# Altium PCB C2Sv0 - Sensor.PcbDoc
Units mm, origin at the board's own origin, x right, y up, seen from the top; angles counter-clockwise.
Board outline 35 x 40 mm, 4 copper layers (Top Layer, Mid Layer 1, Mid Layer 2, Bottom Layer), stack 1.57 mm thick; 30 components, 24 nets, 191 pads, 85 vias.
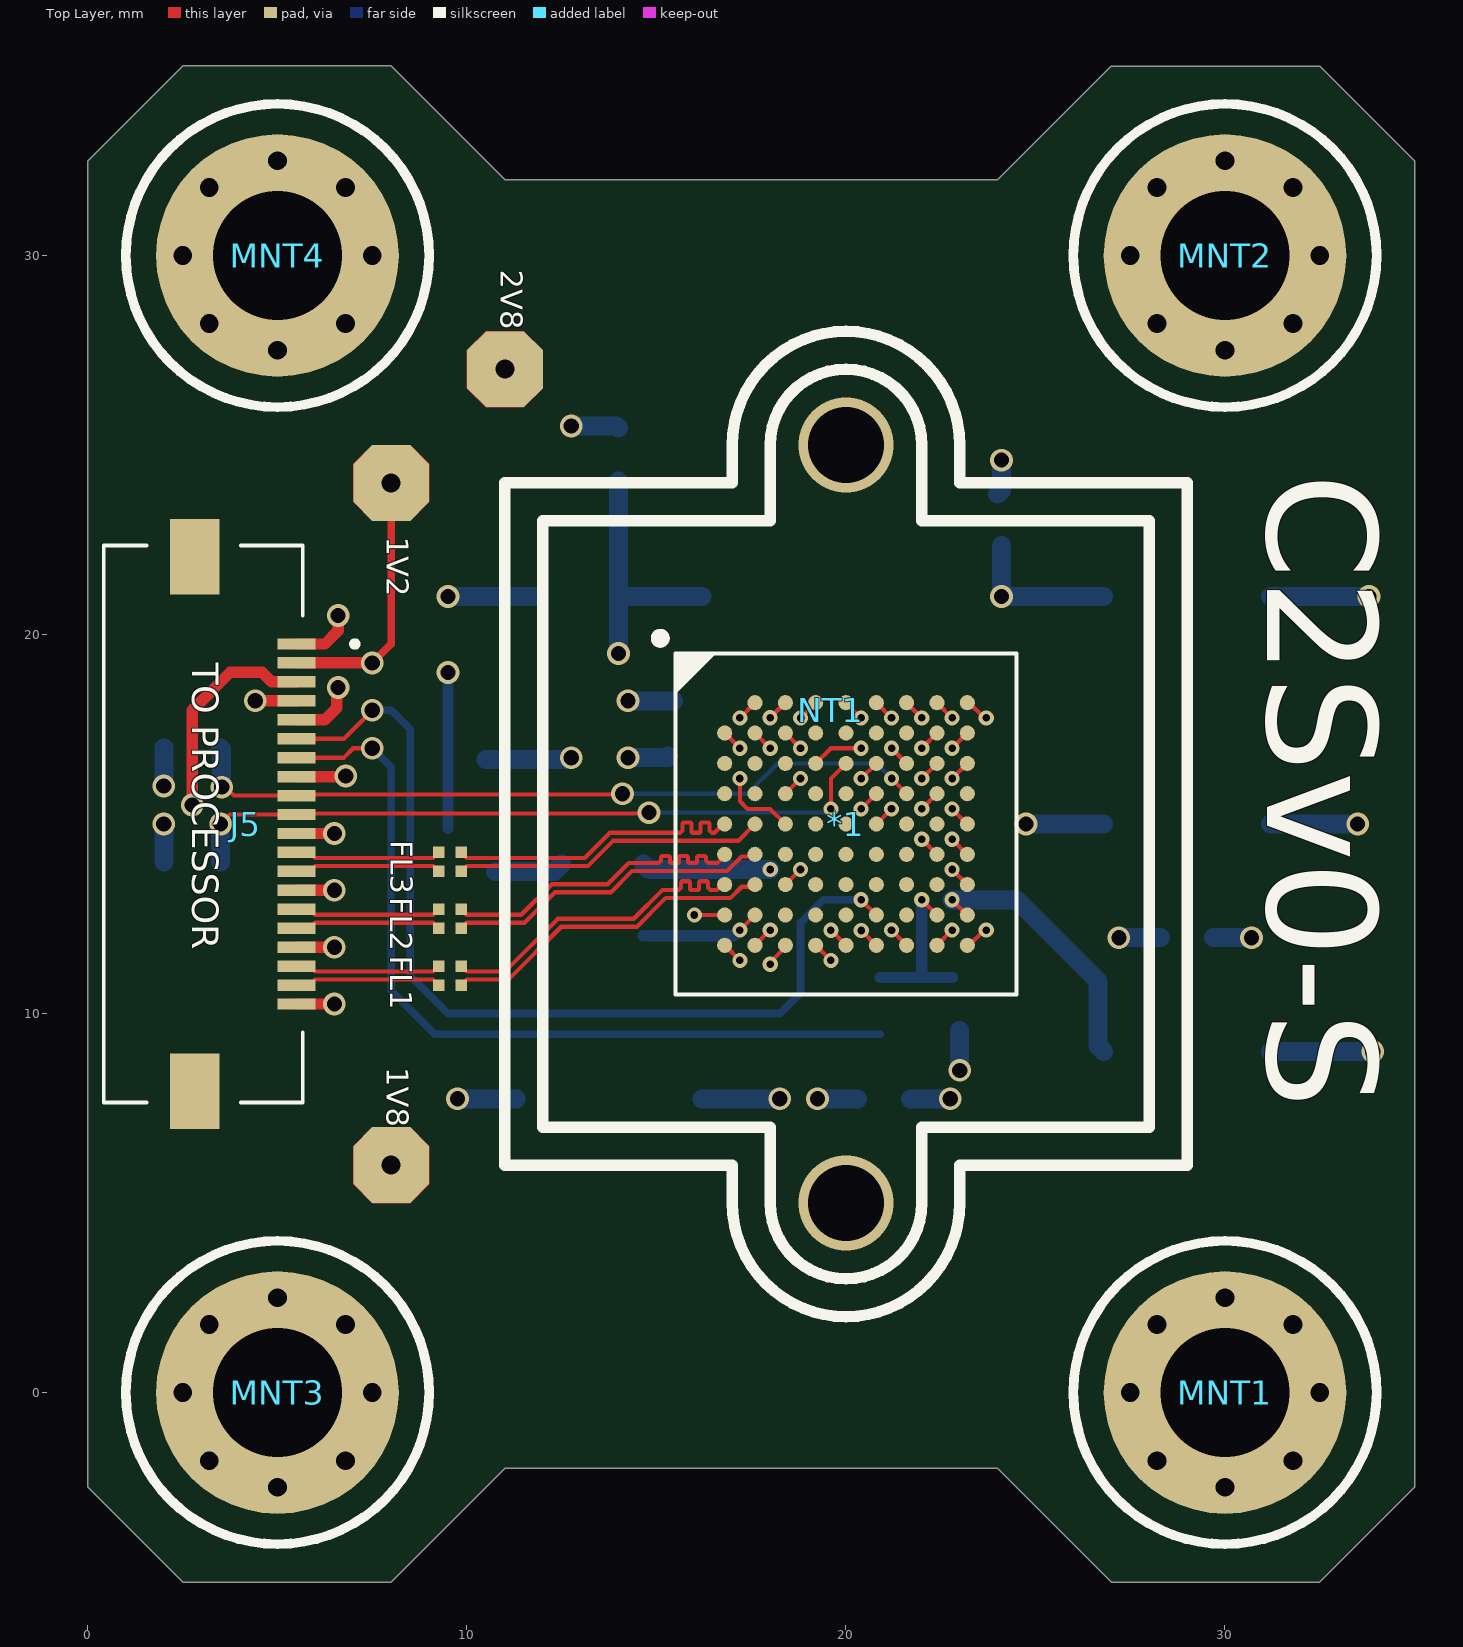
[diagram p0: Top Layer view]
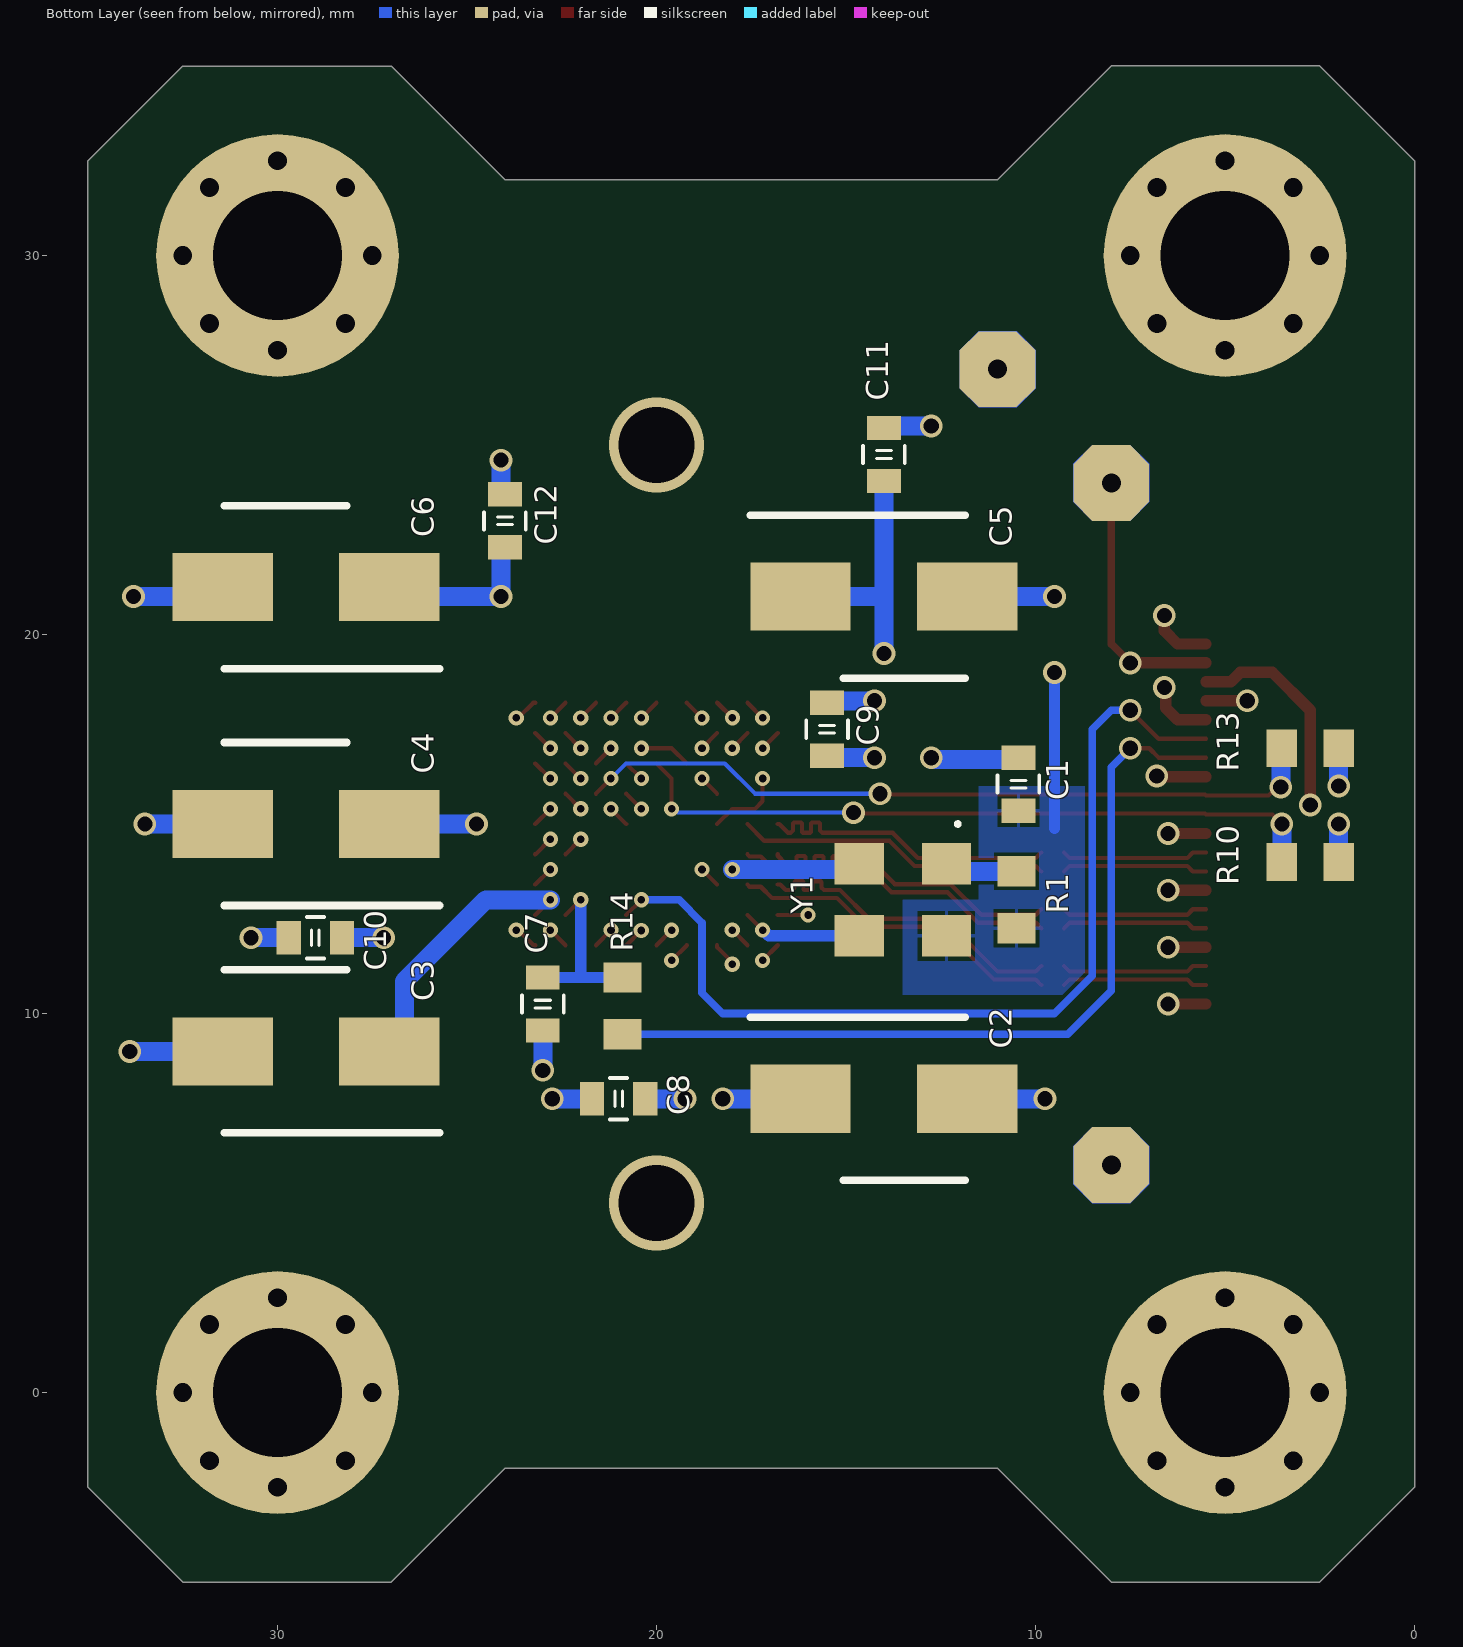
[diagram p1: Bottom Layer view, seen from below]
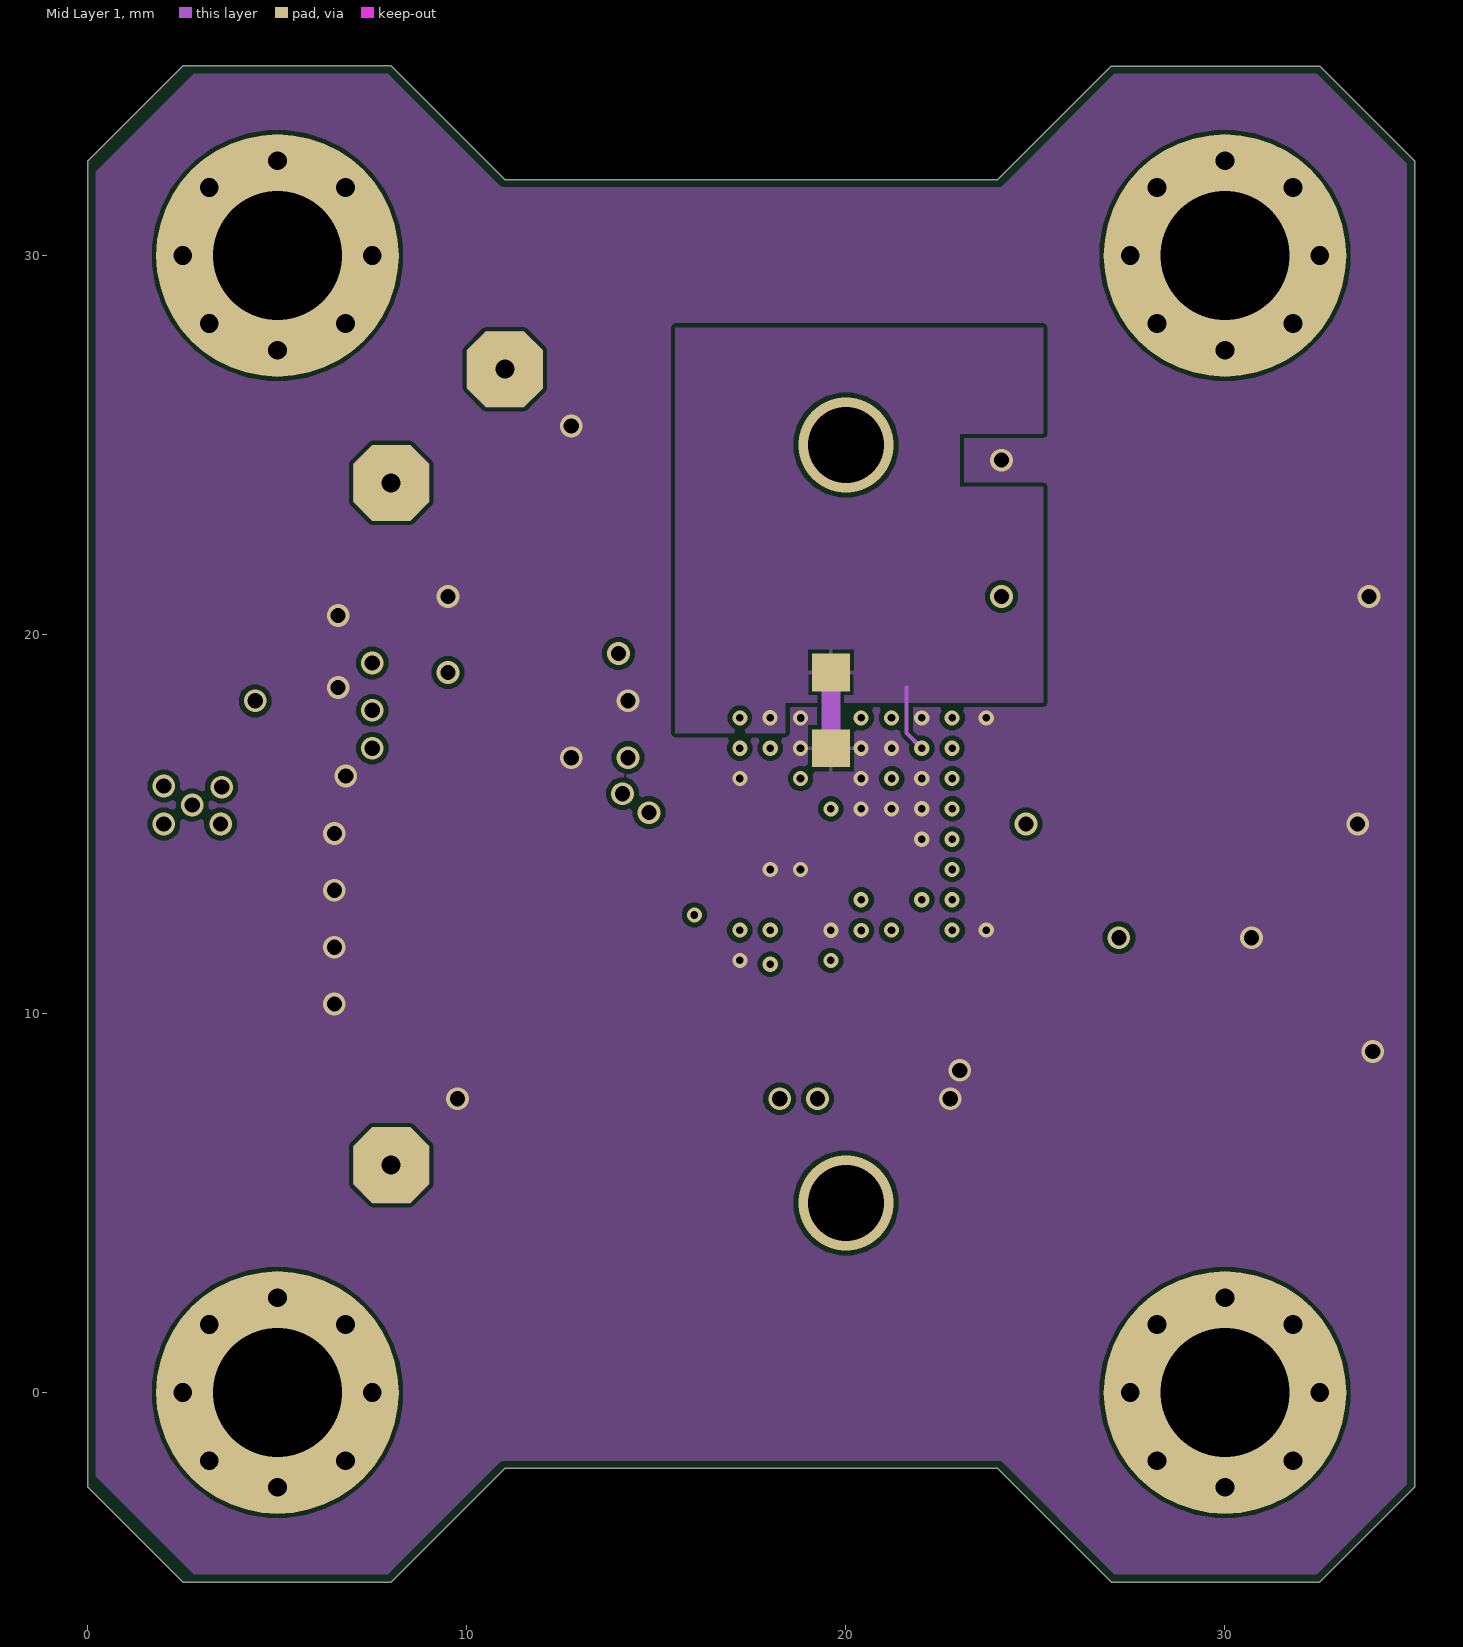
[diagram p2: Mid Layer 1]
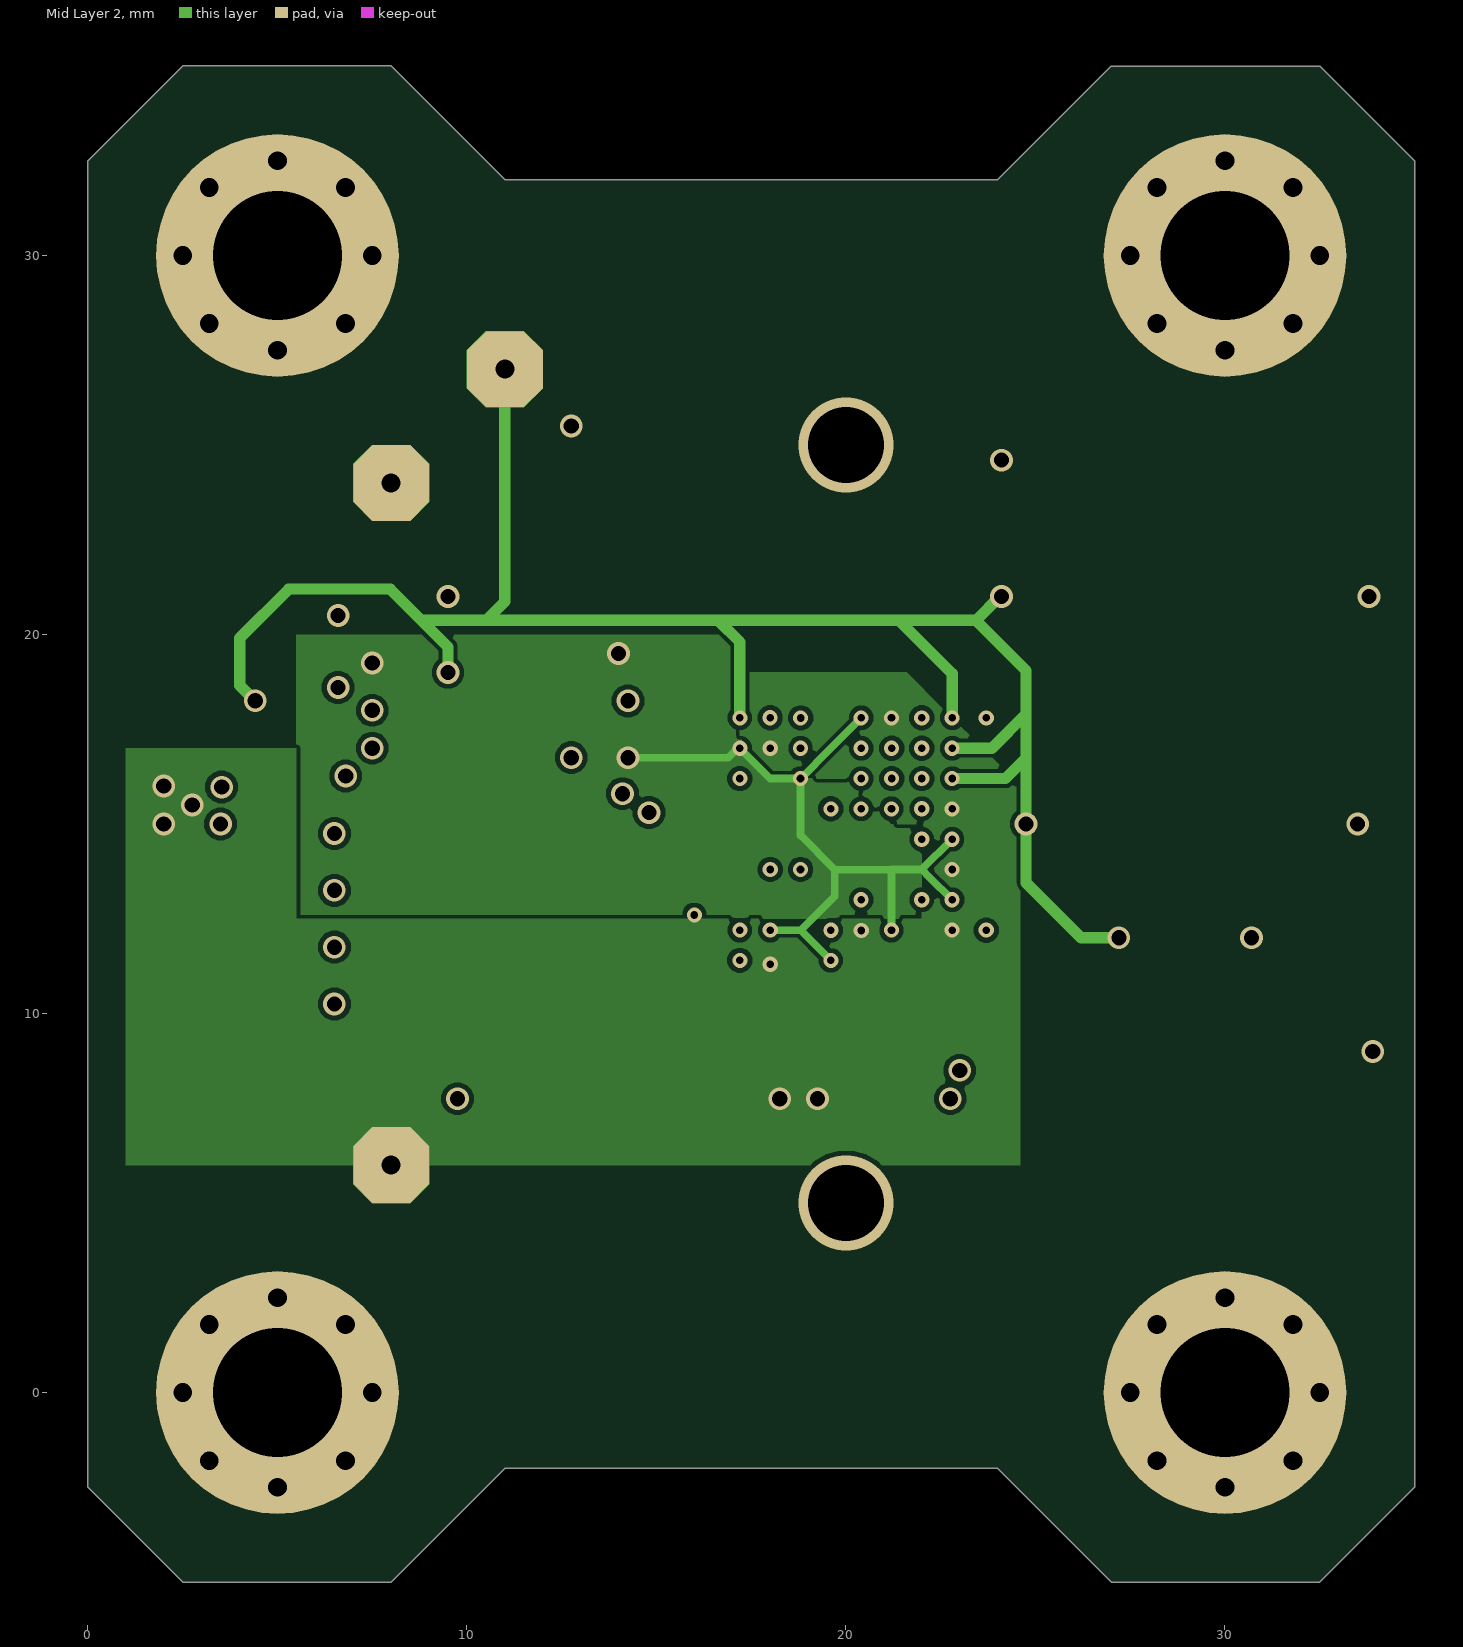
[diagram p3: Mid Layer 2]
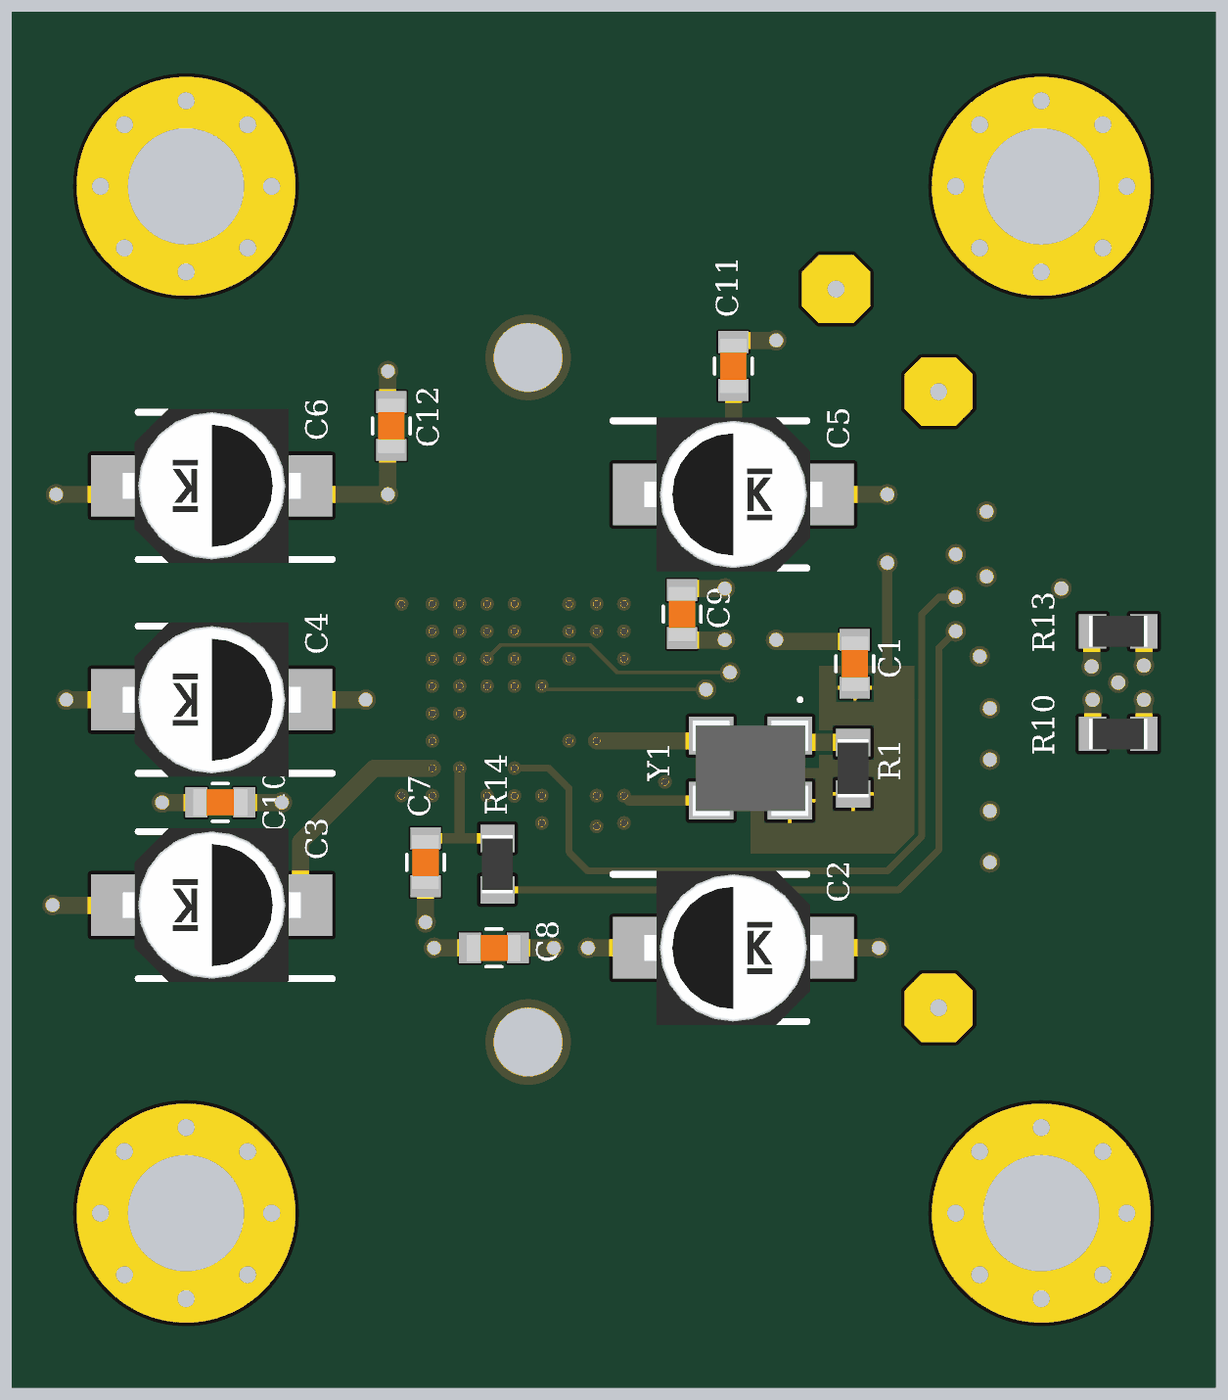
[diagram p4: 3D render of the assembled board from below, using the file's embedded part models]

## Layer stack, top to bottom
Top Solder: solder mask 0.0127, Solder Resist, Dk 3.8
Top Layer: signal copper 0.035
Dielectric 1: prepreg 0.1, 2313, Dk 4.05
Mid Layer 1: signal copper 0.0175
Core: core 1.265, FR-4, Dk 4.5
Mid Layer 2: signal copper 0.0175
Dielectric 2: prepreg 0.1, 2313, Dk 4.05
Bottom Layer: signal copper 0.035
Bottom Solder: solder mask 0.0127, Solder Resist, Dk 3.8

## Board outline
0,-2.5 2.5,-5 8,-5 11,-2 24,-2 27,-5 32.5,-5 35,-2.5 35,32.5 32.5,35 27,35 24,32 11,32 8,35 2.5,35 0,32.5

## Design rules (kind name [scope] priority, off if disabled: settings)
BoardOutlineClearance [All] p1: gap=0.2 ignorepadtopadclearanceinfootprint=FALSE
Clearance [All] p1: gap=0.102 ignorepadtopadclearanceinfootprint=TRUE except(0.127: Arc-Via Track-Via SMDPad-Via THPad-Via Via-Via Via-Fill Via-Poly Via-Region Via-Text)
ComponentClearance [All] p1: gap=0.102 collisioncheckmode=3 verticalgap=0.102 showdistances=TRUE
DiffPairsRouting [All] p1: maxlimit=0.102 minlimit=0.102 mostfreqgap=0.102 toplayer_minwidth=0.102 toplayer_maxwidth=1816.048 toplayer_prefwidth=0.102 midlayer1_minwidth=0.102 midlayer1_maxwidth=1816.048 midlayer1_prefwidth=0.102 midlayer2_minwidth=0.102 midlayer2_maxwidth=1816.048 midlayer2_prefwidth=0.102 bottomlayer_minwidth=0.102 bottomlayer_maxwidth=1816.048 bottomlayer_prefwidth=0.102 maxuncoupledlength=12.7
Height [All] p1: minheight=0 maxheight=1816.048 prefheight=12.7
HoleSize [All] p1: absolutevalues=TRUE maxlimit=6.3 minlimit=0.2 maxpercent=80.000 minpercent=20.000
HoleToHoleClearance [All] p1: gap=0.25 allowstackedmicrovias=FALSE
MatchedLengths [InDifferentialPairClass('All Differential Pairs')] p1: tolerance=25.4 checknetsindiffpair=FALSE checkdiffpairvsdiffpair=TRUE checkxsignals=TRUE checkothers=TRUE usedelayunits=TRUE delaytolerance=40.000000
MinimumAnnularRing [All] p1: minimumring=0.076
MinimumSolderMaskSliver [All] p1: minsoldermaskwidth=0
PlaneClearance [All] p1: clearance=0.102
PlaneConnect PlaneConnectPowerPads [InPadClass('PowerPads')] p1: planeconnectstyle=Direct reliefexpansion=0.508 reliefentries=4 reliefconductorwidth=0.254 reliefairgap=0.254
PlaneConnect [All] p2: pad.planeconnectstyle=Relief pad.reliefexpansion=0.3 pad.reliefentries=4 pad.reliefconductorwidth=0.102 pad.reliefairgap=0.102 via.planeconnectstyle=Direct via.reliefexpansion=0.3 via.reliefentries=4 via.reliefconductorwidth=0.127 via.reliefairgap=0.127
PolygonConnect PolygonConnectPowerPads [All vs (InPadClass('PowerPads'))] p1: connectstyle=Direct reliefconductorwidth=0.254 reliefentries=4 polygonreliefangle="90 Angle" airgapwidth=0.254
PolygonConnect [All] p2: thpad.connectstyle=Relief thpad.reliefconductorwidth=0.102 thpad.reliefentries=4 thpad.polygonreliefangle="90 Angle" thpad.airgapwidth=0.102 smdpad.connectstyle=Relief smdpad.reliefconductorwidth=0.102 smdpad.reliefentries=4 smdpad.polygonreliefangle="90 Angle" smdpad.airgapwidth=0.102 via.connectstyle=Direct via.reliefconductorwidth=0.127 via.reliefentries=4 via.polygonreliefangle="90 Angle" via.airgapwidth=0.127
RoutingVias [All] p1: holewidth=0.2 width=0.45 viastyle="Through Hole" minholewidth=0.15 minwidth=0.25 maxholewidth=6.3 maxwidth=6.55
SilkToSilkClearance [All] p1: silktosilkclearance=0
SilkToSolderMaskClearance [IsPad] p1: minsilkscreentomaskgap=0.102 clearancetoexposedcopper=TRUE
SolderMaskExpansion SME_Via [IsVia] p1: expansion=0.102 istentingtop=TRUE
SolderMaskExpansion [All] p2: expansion=0.102 istentingtop=FALSE
SupplyNets "Schematic Supply Nets_9" [InNet('DGND')] p1: voltage=0.000
SupplyNets "Schematic Supply Nets_6" [InNet('2V8')] p2: voltage=0.000
SupplyNets "Schematic Supply Nets_5" [InNet('AGND')] p3: voltage=0.000
SupplyNets "Schematic Supply Nets_2" [InNet('1V8')] p4: voltage=0.000
SupplyNets "Schematic Supply Nets" [InNet('1V2')] p5: voltage=0.000
Width [All] p1: maxlimit=1816.048 minlimit=0.102 preferedwidth=0.102
20 further rules are at their usual default settings.

## Classes and differential pairs
differential pair STM_DATA1: +STM_DATA1_P -STM_DATA1_N
differential pair STM_DATA0: +STM_DATA0_P -STM_DATA0_N
differential pair STM_CLK: +STM_CLK_P -STM_CLK_N
differential pair AR_DATA1: +AR_DATA1_P -AR_DATA1_N
differential pair AR_DATA0: +AR_DATA0_P -AR_DATA0_N
differential pair AR_CLK: +AR_CLK_P -AR_CLK_N

## Components (designator, comment, footprint, x,y, rotation, side; value= is the part's Value field where it differs from the comment)
1V2 "TP_2MM" "TESTPOINT 2MM" 8,24 r0 top
1V8 "TP_2MM" "TESTPOINT 2MM" 8,6 r0 top
2V8 "TP_2MM" "TESTPOINT 2MM" 11,27 r0 top
*1 "AR0147 - iBGA80" "AR0147 - IBGA80" 20,15 r270 top locked
C1 "MCD-00237" C0603 10.449,16.051 r270 bottom value=4.7uF
C2 "EDH106M016A9BAA" EDH106M016A9BAA 14,7.75 r180 bottom
C3 "EDH106M016A9BAA" EDH106M016A9BAA 29.25,9 r0 bottom
C4 "EDH106M016A9BAA" EDH106M016A9BAA 29.25,15 r0 bottom
C5 "EDH106M016A9BAA" EDH106M016A9BAA 14,21 r180 bottom
C6 "EDH106M016A9BAA" EDH106M016A9BAA 29.25,21.25 r0 bottom
C7 "MCD-00237" C0603 23,10.25 r90 bottom value=100nF
C8 "MCD-00237" C0603 21,7.75 r180 bottom value=0.1uF
C9 "MCD-00237" C0603 15.5,17.5 r270 bottom value=0.1uF
C10 "MCD-00237" C0603 29,12 r180 bottom value=0.1uF
C11 "MCD-00237" C0603 14,24.75 r270 bottom value=0.1uF
C12 "MCD-00237" C0603 24,23 r270 bottom value=0.1uF
FL1 "DLM0NSB120HY2D" DLM0NSB120HY2D 9.55,11 r180 top
FL2 "DLM0NSB120HY2D" DLM0NSB120HY2D 9.55,12.5 r180 top
FL3 "DLM0NSB120HY2D" DLM0NSB120HY2D 9.55,14 r180 top
J5 "505110-2096" 5051102096 5,15 r270 top
MNT1 "M3 Mount" M3_Mount-Footprint-1 30,0 r0 top
MNT2 "M3 Mount" M3_Mount-Footprint-1 30,30 r0 top
MNT3 "M3 Mount" M3_Mount-Footprint-1 5,0 r0 top
MNT4 "M3 Mount" M3_Mount-Footprint-1 5,30 r0 top
NT1 "NetTie_SMD" NETTIE_SMD 19.6,18 r270 top net-tie
R1 "Resistor 10k +/-1% 0603 100mW" RESC1608X55X25ML10T15-1 10.5,13 r90 bottom value=10k
R10 "Resistor 10k +/-1% 0603 100mW" RESC1608X55X25ML10T15-1 2.75,14 r0 bottom value=1.5k
R13 "Resistor 10k +/-1% 0603 100mW" RESC1608X55X25ML10T15-1 2.75,17 r0 bottom value=1.5k
R14 "Resistor 10k +/-1% 0603 100mW" RESC1608X55X25ML10T15-1 20.9,10.2 r90 bottom value=22k
Y1 "ECS-TXO-3225MV-240-TR" ECSTXO3225MV240TR 13.5,13 r0 bottom

## Footprints (in the part's own frame and the unit in brackets; to place one, negate y for a bottom-side part, rotate by r counter-clockwise, add the part's x,y. Pads: shape width x height; smd on the part's side, far side on the other; paste and mask are expansions set on the pad)
5051102096 [mm]
  rect 0.3x1 smd: 1(-4.75,0.5) 2(-4.25,0.5) 3(-3.75,0.5) 4(-3.25,0.5) 5(-2.75,0.5) 6(-2.25,0.5) 7(-1.75,0.5) 8(-1.25,0.5) 9(-0.75,0.5) 10(-0.25,0.5) 11(0.25,0.5) 12(0.75,0.5) 13(1.25,0.5) 14(1.75,0.5) 15(2.25,0.5) 16(2.75,0.5) 17(3.25,0.5) 18(3.75,0.5) 19(4.25,0.5) 20(4.75,0.5)
  rect 2x1.3 smd: MP1(-7.05,-2.185) MP2(7.05,-2.185)
  silkscreen extent -7.35,-4.58 7.35,2.09, body extent -7.75,-4.53 7.75,0.77, height 1.9
"AR0147 - IBGA80" [mm]
  round 0.4 smd: A2(-3.2,-2.4) A3(-3.2,-1.6) A4(-3.2,-0.8) A5(-3.2,0) A6(-3.2,0.8) A7(-3.2,1.6) A8(-3.2,2.4) A9(-3.2,3.2) B1(-2.4,-3.2) B2(-2.4,-2.4) B3(-2.4,-1.6) B4(-2.4,-0.8) B5(-2.4,0) B6(-2.4,0.8) B7(-2.4,1.6) B8(-2.4,2.4) B9(-2.4,3.2) C1(-1.6,-3.2) C2(-1.6,-2.4) C3(-1.6,-1.6) C4(-1.6,-0.8) C5(-1.6,0) C6(-1.6,0.8) C7(-1.6,1.6) C8(-1.6,2.4) C9(-1.6,3.2) D1(-0.8,-3.2) D2(-0.8,-2.4) D3(-0.8,-1.6) D4(-0.8,-0.8) D5(-0.8,0) D6(-0.8,0.8) D7(-0.8,1.6) D8(-0.8,2.4) D9(-0.8,3.2) E1(0,-3.2) E2(0,-2.4) E3(0,-1.6) E4(0,-0.8) E5(0,0) E6(0,0.8) E7(0,1.6) E8(0,2.4) E9(0,3.2) F1(0.8,-3.2) F2(0.8,-2.4) F3(0.8,-1.6) F4(0.8,-0.8) F5(0.8,0) F6(0.8,0.8) F7(0.8,1.6) F8(0.8,2.4) F9(0.8,3.2) G1(1.6,-3.2) G2(1.6,-2.4) G3(1.6,-1.6) G4(1.6,-0.8) G5(1.6,0) G6(1.6,0.8) G7(1.6,1.6) G8(1.6,2.4) G9(1.6,3.2) H1(2.4,-3.2) H2(2.4,-2.4) H3(2.4,-1.6) H4(2.4,-0.8) H5(2.4,0) H6(2.4,0.8) H7(2.4,1.6) H8(2.4,2.4) H9(2.4,3.2) J1(3.2,-3.2) J2(3.2,-2.4) J3(3.2,-1.6) J4(3.2,-0.8) J5(3.2,0) J6(3.2,0.8) J7(3.2,1.6) J8(3.2,2.4) J9(3.2,3.2)
  silkscreen extent -13,-9 13,9, body extent -4.5,-4.5 4.5,4.5, height 1.5
C0603 [mm]
  rect 0.64x0.89 smd mask+0.05: 1(-0.7,0) 2(0.7,0)
  silkscreen extent -0.23,-0.55 0.23,0.55, body extent -0.9,-0.5 0.9,0.5, height 1.4
DLM0NSB120HY2D [mm]
  rect 0.3x0.3 smd: 1(-0.3,0.25) 2(0.3,0.25) 3(0.3,-0.25) 4(-0.3,-0.25)
  body extent -0.43,-0.33 0.43,0.33, height 0.45
ECSTXO3225MV240TR [mm]
  rect 1.3x1.1 smd: 1(-1.15,-0.95) 2(1.15,-0.95) 3(1.15,0.95) 4(-1.15,0.95)
  silkscreen extent -1.5,-2.05 -1.4,-1.95, body extent -1.69,-1.39 1.69,1.39, height 1.3
EDH106M016A9BAA [mm]
  rect 2.65x1.8 smd: 1(-2.2,0) 2(2.2,0)
  silkscreen extent -3.52,-2.15 2.15,2.15, body extent -2.6,-2.25 2.6,2.25, height 5.66
M3_Mount-Footprint-1 [mm]
  round 0.8 hole 0.5: 1(-2.5,0) 1(-1.8,-1.8) 1(-1.8,1.8) 1(0,-2.5) 1(0,2.5) 1(1.8,-1.8) 1(1.8,1.8) 1(2.5,0)
  round 6.4 hole 3.4: 1(0,0)
NETTIE_SMD [mm]
  rect 1x1 on Mid1 mask-10: 1(-1,0) 2(1,0)
  Mid Layer 1 region: -0.75,-0.251 0.75,-0.251 0.75,0.249 -0.75,0.249
RESC1608X55X25ML10T15-1 [mm] "Chip Resistor, 2-Leads, Body 1.70x0.90mm, IPC Low Density"
  rect 0.8x1 smd: 1(-0.75,0) 2(0.75,0)
  body extent -0.85,-0.45 0.85,0.45, height 0.55
"TESTPOINT 2MM" [mm]
  oct 2x2 hole 0.5: TP(0,0)
  Top Layer region: -0.5,-1 -1,-0.5 -1,0.5 -0.5,1 0.5,1 1,0.5 1,-0.5 0.5,-1
  Mid Layer 1 region: -0.5,-1 -1,-0.5 -1,0.5 -0.5,1 0.5,1 1,0.5 1,-0.5 0.5,-1
  Mid Layer 2 region: -0.5,-1 -1,-0.5 -1,0.5 -0.5,1 0.5,1 1,0.5 1,-0.5 0.5,-1
  Bottom Layer region: -0.5,-1 -1,-0.5 -1,0.5 -0.5,1 0.5,1 1,0.5 1,-0.5 0.5,-1

## Part data
C1 C7 C8 C9 C10 C11 C12: library part CMP-112-000001-1, "Capacitor, MLCC, 100nF, 6V3, X5R, 10%, 0603, T=0,8mm", Manufacturer=YAGEO, Manufacturer Part Number=CC0603KRX5R5BB104, Package=C0603, Component Type=Capacitors, ComponentLink1Description=Datasheet, ComponentLink1URL=http://tunmcdsvn.tun.st.com/Component_Datasheet_Library/Trunk/Capacitors/Yageo_Multilayer_capacitor_X5R_series_100pF_to_100uF, Design Item ID=MCD-00237, ECCN_EU=NEC, ECCN_US=EAR99, Internal_Part_Number=MCD-00237, Manufacturer_Part_Number=CC0603KRX5R5BB104, Part_Type=Capacitor, Pin Count=2, Provided_By=SUBCO, Source=MB1364.SCHLIB, Status=Released
C2 C3 C4 C5 C6: "Capacitor Polarised", Manufacturer_Name=KEMET, Mouser Part Number=80-EDH106M016A9BAA, Arrow Part Number=EDH106M016A9BAA, Arrow Price/Stock=https://www.arrow.com/en/products/edh106m016a9baa/kemet-corporation?utm_currency=USD&region=nac, Datasheet Link=https://content.kemet.com/datasheets/KEM_A4049_EDH.pdf, Height=5.65mm, Manufacturer_Part_Number=EDH106M016A9BAA, Mouser Price/Stock=https://www.mouser.co.uk/ProductDetail/KEMET/EDH106M016A9BAA?qs=iR2ablhfrmGRSCLQdrL4eg%3D%3D
FL1 FL2 FL3: "Filter", Manufacturer_Name="Murata Electronics", Mouser Part Number=81-DLM0NSB120HY2D, Datasheet Link=https://www.murata.com/en-us/products/productdetail?partno=DLM0NSB120HY2%23, Height=0.5mm, Manufacturer_Part_Number=DLM0NSB120HY2D, Mouser Price/Stock=https://www.mouser.co.uk/ProductDetail/Murata-Electronics/DLM0NSB120HY2D?qs=d0WKAl%252BL4Kark8uQYdrkog%3D%3D
J5: "Connector", Manufacturer_Name=Molex, Mouser Part Number=538-505110-2096, Datasheet Link=https://componentsearchengine.com/Datasheets/1/505110-2096.pdf, Height=2.1mm, Manufacturer_Part_Number=505110-2096, Mouser Price/Stock=https://www.mouser.co.uk/ProductDetail/Molex/505110-2096?qs=IvjI65BR3TVK2gHWyfgM0A%3D%3D
MNT1 MNT2 MNT3 MNT4: library part CMP-002-00124-2, "M3 mounting hole", AUTHOR="Raphael Ho"
NT1: library part CMP-018-000019-1, "Net Tie SMD", Design Item ID=NetTie_SMD, Source=Schematic-Lib-PhilsLab.SchLib
R1 R10 R13 R14: library part CMP-009-00181-1, "Chip Resistor, 10k Ohm, 0.1 W, -55 to 155 degC, 0603 (1608 Metric)", Case/Package=0603, Max Operating Temperature=155°C, Min Operating Temperature=-55°C, Power=100mW, Tolerance=1%, Voltage Rating=50V, Created by="Micah Randall", Design Item ID=CMP-009-00006-5, Mounting Technology=SM, Pins=2, RoHS Compliant=Yes, Source="Components - 14.11.22 - 11.28.SchLib"
Y1: "Crystal or Oscillator", Manufacturer_Name=ECS, Mouser Part Number=520-TXO-3225MV-240-T, Arrow Part Number=ECS-TXO-3225MV-240-TR, Arrow Price/Stock=https://www.arrow.com/en/products/ecs-txo-3225mv-240-tr/ecs-international?region=nac, Datasheet Link=https://eu.mouser.com/datasheet/2/122/ECS-TXO-3225MV-1634330.pdf, Height=1.2mm, Manufacturer_Part_Number=ECS-TXO-3225MV-240-TR, Mouser Price/Stock=https://www.mouser.co.uk/ProductDetail/ECS/ECS-TXO-3225MV-240-TR?qs=d0WKAl%252BL4KYXn7UuwSFJGQ%3D%3D

## Via types
v1: diameter 0.4, hole 0.2, Top Layer to Bottom Layer, tented both sides, 45 vias
v2: diameter 0.6, hole 0.4, Top Layer to Bottom Layer, tented both sides, 38 vias
v3: diameter 2.5, hole 2, Top Layer to Bottom Layer, 2 vias

## Nets (pads, with @x,y where several pads share a name; then routed paths per layer and width w, separated by ;. In a path a pad name is that pad's centre, name@x,y a point inside that pad or via, vN(x,y) a via of type N, cw(c..) or ccw(c..) an arc to the next point about the centre after c; other vN are vias at no path point)
1V2: 1V2.TP *1.A5 *1.B1 *1.D3 *1.F9 *1.H9 *1.J2 *1.J4 *1.J7 C3.1 C5.1 C9.2 C11.2 J5.2 | length 46.1
  Top Layer w0.11: *1.B1 v1(17.2,17) ; *1.J2 v1(18,12.2) ; *1.D3 v1(18.8,16.2) ; *1.J4 v1(19.6,11.4) ; *1.A5 v1(20.4,17.8) ; v1(21.2,12.2) *1.J7 ; v1(22.798,14.598) 22.8,14.598 23.198,14.2 *1.F9 *1.F9@23.209,14.2 ; v1(22.8,13) *1.H9
  Top Layer w0.2: v2(7.5,19.25) 8,19.75 1V2.TP
  Top Layer w0.3: J5.2 v2(7.5,19.25)
  Mid Layer 2 w0.2: v2(14.25,16.75) 16.896,16.75 17.146,17 v1(17.2,17) 18,16.2 v1(18.8,16.2) ; v1(18,12.2) 18.802,12.2 ; v1(19.6,11.4) 18.802,12.198 18.802,12.2 ; v1(20.4,17.8) 19.6,17 v1(18.8,16.2) ; v1(21.2,12.2) 21.2,13.8 ; v1(22.798,14.598) 22,13.8 ; v1(22.8,13) 22.2,13.6 22,13.8 ; v1(18.8,16.2) 18.8,14.697 19.7,13.797 ; 18.802,12.2 19.7,13.098 19.7,13.797 ; 19.7,13.797 21.197,13.797 21.2,13.8 ; 21.2,13.8 22,13.8
  Bottom Layer w0.5: v2(14,19.5) 14,21 ; C11.2 14,21 ; v2(14.25,16.75) 15.305,16.75 C9.2@15.305,16.8 ; C5.1 16,21 14,21 ; v1(22.8,13) 24.5,13 26.654,10.846 26.654,9.146 C3.1@26.8,9
1V8: 1V8.TP *1.A6 *1.B2 *1.E9 *1.G9 *1.H1 *1.J3 *1.J6 *1.J8 C2.1 C8.2 J5.3 R10.1 R13.1 | length 15.7
  Top Layer w0.11: v1(16,12.6) *1.H1 ; *1.B2 v1(18,17) ; v1(18,11.3) 18,11.35 18.4,11.75 *1.J3 ; v1(20.402,12.19) 20.405,12.19 20.795,11.8 *1.J6 ; *1.A6 v1(21.2,17.8) ; *1.J8 v1(22.8,12.2) ; v1(22.8,13.8) *1.G9 ; v1(22.8,15.4) *1.E9
  Top Layer w0.3: v2(2.75,15.5) 2.75,18 3.75,19 4.6,19 4.85,18.75 J5.3
  Bottom Layer w0.5: R10.1 v2(2,15) ; v2(2,16) R13.1 ; C2.1 v2(18.25,7.75) ; v2(19.25,7.75) C8.2
2V8: 2V8.TP *1.A2 *1.A8 *1.B9 *1.C9 C1.2 C4.1 C6.1 C10.2 C12.2 J5.4 R1.1 Y1.4 | length 67.2
  Top Layer w0.11: v1(17.2,17.8) *1.A2 ; *1.A8 v1(22.8,17.8) ; v1(22.798,16.2) *1.C9 ; v1(22.798,17) *1.B9
  Top Layer w0.3: v2(4.411,18.25) J5.4
  Mid Layer 2 w0.3: v2(4.411,18.25) 4,18.661 4,19.9 5.3,21.2 7.971,21.2 8.8,20.371 ; v2(9.5,19) 9.5,19.671 8.8,20.371 ; 2V8.TP 11,20.871 10.5,20.371 ; v1(17.2,17.8) 17.2,19.8 16.629,20.371 ; v1(22.798,16.2) 24.207,16.2 24.75,16.743 ; v1(22.798,17) 23.85,17 24.75,17.9 ; v1(22.8,17.8) 22.8,18.971 21.4,20.371 ; v2(24.1,21) 24.058,21 23.429,20.371 ; v2(27.2,12) 26.2,12 24.75,13.45 v2(24.75,15) 24.75,16.743 ; 8.8,20.371 10.5,20.371 ; 10.5,20.371 16.629,20.371 ; 16.629,20.371 21.4,20.371 ; 21.4,20.371 23.429,20.371 ; 23.429,20.371 24.75,19.05 24.75,17.9 ; 24.75,16.743 24.75,17.9
  Bottom Layer w0.3: 9.5,14.89 v2(9.5,19)
  Bottom Layer w0.5: C12.2@24.1,22.35 v2(24.1,21) C6.1@26.8,21 ; v2(24.75,15) C4.1@26.8,15 ; v2(27.2,12) C10.2
AGND: *1.A3 *1.B8 NT1.1 | length 2.9
  Top Layer w0.11: v1(17.998,17.802) 18,17.802 18.398,18.2 *1.A3 ; v1(22,17) *1.B8
  Mid Layer 1 w0.11: 21.6,18.6 21.6,17.4 v1(22,17)
AR_CLK: *1.H2 Y1.3 | length 3.2
  Top Layer w0.11: v1(17.2,12.2) *1.H2
  Bottom Layer w0.3: Y1.3 17.036,12.05 17.186,12.2 v1(17.2,12.2)
AR_CLK_N: *1.E2 FL3.1 | length 8.3
  Top Layer w0.11: FL3.1 9.994,13.894 13.193,13.894 13.856,14.557 17.157,14.557 *1.E2
AR_CLK_P: *1.E1 FL3.4 | length 8.3
  Top Layer w0.11: FL3.4 9.994,14.106 13.106,14.106 13.768,14.768 15.566,14.768 15.621,14.768 15.685,14.833 15.685,15.014 15.709,15.037 15.899,15.037 15.922,15.014 15.922,14.792 15.946,14.768 16.136,14.768 16.159,14.792 16.159,15.014 16.183,15.037 16.373,15.037 16.396,15.014 16.396,14.833 16.461,14.768 16.528,14.768 16.76,15 *1.E1
AR_DATA0_N: *1.G2 FL1.1 | length 8.8
  Top Layer w0.11: FL1.1 9.994,10.894 11.093,10.894 12.488,12.288 14.488,12.288 15.243,13.043 16.948,13.043 17.249,13.345 17.545,13.345 *1.G2
AR_DATA0_P: *1.G1 FL1.4 | length 8.7
  Top Layer w0.11: FL1.4 9.994,11.106 11.006,11.106 12.4,12.5 14.4,12.5 15.155,13.255 15.528,13.255 15.583,13.255 15.647,13.319 15.647,13.464 15.671,13.488 15.86,13.488 15.884,13.464 15.884,13.279 15.908,13.255 16.097,13.255 16.121,13.279 16.121,13.464 16.145,13.488 16.334,13.488 16.358,13.464 16.358,13.319 16.423,13.255 16.591,13.255 16.736,13.4 *1.G1
AR_DATA1_N: *1.F2 FL2.1 | length 8.6
  Top Layer w0.11: FL2.1 9.994,12.394 11.52,12.394 12.326,13.2 13.8,13.2 14.357,13.757 16.607,13.757 16.861,13.757 17.249,14.145 17.545,14.145 *1.F2
AR_DATA1_P: *1.F1 FL2.4 | length 8.6
  Top Layer w0.11: FL2.4 9.994,12.606 11.432,12.606 12.238,13.412 13.712,13.412 14.269,13.968 15,13.968 15.055,13.968 15.119,14.033 15.119,14.128 15.143,14.152 15.333,14.152 15.356,14.128 15.356,13.992 15.38,13.968 15.57,13.968 15.593,13.992 15.593,14.128 15.617,14.152 15.807,14.152 15.83,14.128 15.83,13.992 15.854,13.968 16.044,13.968 16.067,13.992 16.067,14.128 16.091,14.152 16.281,14.152 16.304,14.128 16.304,14.033 16.369,13.968 16.607,13.968 16.8,14.161 *1.F1
AR_RST: J5.7 R14.1 | length 22.1
  Top Layer w0.11: J5.7 6.75,16.75 7,17 v2(7.5,17)
  Bottom Layer w0.2: v2(7.5,17) 8,16.5 8,10.6 9.15,9.45 R14.1
AR_RST_PIN: *1.H8 C7.2 R14.2 | length 4.5
  Top Layer w0.11: v1(22,13) *1.H8
  Bottom Layer w0.3: R14.2 22,10.95 ; v1(22,13) 22,10.95 ; C7.2@22.8,10.95 22,10.95
DGND: *1.A4 *1.A7 *1.A9 *1.B3 *1.C4 *1.C6 *1.C7 *1.C8 *1.D6 *1.D8 *1.E3 *1.E6 *1.F8 *1.G3 *1.J1 *1.J5 *1.J9 C1.1 C2.2 C3.2 C4.2 C5.2 C6.2 C7.1 C8.1 C9.1 C10.1 C11.1 C12.1 J5.1 J5.5 J5.8 J5.11 J5.14 J5.17 J5.20 NT1.2 Y1.2 | length 44.5
  Top Layer w0.11: *1.J1 v1(17.2,11.4) ; v1(17.2,16.2) 17.2,15.6 17.4,15.4 18,15.4 *1.E3 ; *1.G3 v1(18.8,13.8) ; *1.B3 v1(18.8,17) ; v1(18.802,17.798) 18.802,17.8 19.2,18.198 *1.A4 ; *1.C4 19.6,17 v1(20.4,17) ; v1(19.6,12.198) *1.J5 ; v1(20.4,15.4) *1.D6 ; v1(20.4,16.2) *1.C6 ; *1.E6 v1(21.2,15.4) ; v1(21.204,17) 21.204,16.998 *1.C7 *1.C7 ; *1.A7 v1(22,17.8) ; v1(22,16.2) *1.C8 ; v1(22,14.598) *1.F8 ; v1(22,15.402) *1.D8 ; *1.J9 23.25,11.8 23.65,12.2 v1(23.7,12.2) ; *1.A9 23.25,18.2 23.65,17.8 v1(23.7,17.8)
  Top Layer w0.3: J5.20 v2(6.5,10.25) ; J5.17 v2(6.5,11.75) ; J5.14 v2(6.5,13.25) ; J5.11 v2(6.5,14.75) ; J5.8 6.782,16.25 v2(6.8,16.268) ; J5.5 6.25,17.75 6.562,18.062 6.562,18.562 v2(6.6,18.6) ; J5.1 6.25,19.75 6.6,20.1 v2(6.6,20.5)
  Bottom Layer w0.11: C9.1@15.45,18.25 C9.1
  Bottom Layer w0.5: v2(9.5,21) 11.6,21 C5.2 ; v2(9.75,7.75) C2.2@11.3,7.75 ; C1.1@10.5,16.7 v2@12.75,16.7 ; v2(12.75,25.5) 13.95,25.5 C11.1 ; v2(14.25,18.25) C9.1@15.45,18.25 ; Y1.2 14.8,13.8 v1(18,13.8) ; C8.1 v2(22.75,7.75) ; v2(23,8.5) C7.1 ; C12.1 24.1,23.8 v2(24.1,24.6) ; C10.1 v2(30.7,12) ; C3.2@31.2,9 C3.2 v2(33.9,9) ; C4.2@31.2,15 C4.2 v2(33.5,15) ; C6.2@31.2,21 v2(33.8,21)
  other v2: 12.75,16.75
NetR1_2: R1.2 Y1.1 | length 1.8
  Bottom Layer w0.5: R1.2@10.75,13.75 12.3,13.75 Y1.1@12.5,13.95
SCLK: *1.C5 J5.10 R10.2 | length 18.6
  Top Layer w0.11: v2(3.5,15) 3.75,15.25 J5.10 5.525,15.275 14.775,15.275 v2(14.8,15.3) ; v1(19.6,15.4) 19.6,16.2 *1.C5
  Bottom Layer w0.11: v2(14.8,15.3) 19.435,15.3 19.535,15.4 v1(19.6,15.4)
  Bottom Layer w0.5: R10.2 v2(3.5,15)
SDATA: *1.D7 J5.9 R13.2 | length 19.9
  Top Layer w0.11: v2(3.527,15.973) 3.633,15.973 3.856,15.75 J5.9 5.525,15.775 14.075,15.775 v2(14.1,15.8) ; v1(21.204,16.2) 21.204,16.198 *1.D7 *1.D7
  Bottom Layer w0.11: v2(14.1,15.8) 17.4,15.8 18.2,16.6 20.804,16.6 v1(21.204,16.2)
  Bottom Layer w0.5: R13.2 3.527,16.973 v2(3.527,15.973)
STM_CLK_N: FL3.2 J5.13 | length 3.9
  Top Layer w0.11: J5.13 5.85,13.75 5.994,13.894 9.106,13.894 FL3.2
STM_CLK_P: FL3.3 J5.12 | length 3.9
  Top Layer w0.11: J5.12 5.85,14.25 5.994,14.106 9.106,14.106 FL3.3
STM_DATA0_N: FL1.2 J5.19 | length 3.9
  Top Layer w0.11: J5.19 5.85,10.75 5.994,10.894 7.393,10.894 9.106,10.894 FL1.2
STM_DATA0_P: FL1.3 J5.18 | length 3.9
  Top Layer w0.11: J5.18 5.85,11.25 5.994,11.106 7.481,11.106 9.106,11.106 FL1.3
STM_DATA1_N: FL2.2 J5.16 | length 3.9
  Top Layer w0.11: J5.16 5.85,12.25 5.994,12.394 9.106,12.394 FL2.2
STM_DATA1_P: FL2.3 J5.15 | length 3.9
  Top Layer w0.11: J5.15 5.85,12.75 5.994,12.606 9.106,12.606 FL2.3
TEMP_FLAG: *1.H6 J5.6 | length 25.2
  Top Layer w0.11: J5.6 6.75,17.25 v2(7.5,18) ; v1(20.4,13) *1.H6
  Bottom Layer w0.2: v2(7.5,18) 8,18 8.5,17.5 8.5,11 9.5,10 18.25,10 18.8,10.55 18.8,12.4 19.4,13 v1(20.4,13)
pads on no net: *1.B4 *1.B5 *1.B6 *1.B7 *1.C1 *1.C2 *1.C3 *1.D1 *1.D2 *1.D4 *1.D5 *1.D9 *1.E4 *1.E5 *1.E7 *1.E8 *1.F3 *1.F4 *1.F5 *1.F6 *1.F7 *1.G4 *1.G5 *1.G6 *1.G7 *1.G8 *1.H3 *1.H4 *1.H5 *1.H7 J5.MP1 J5.MP2 MNT1.1 MNT2.1 MNT3.1 MNT4.1
copper on no net:
  other v3: 20,5 20,25

## Polygon pours and split planes (outlines as drawn)
DGND on Mid Layer 1 "DGND_L02_P001" (solid, pour order 1): 0,32 3,35 8,35 11,32 24,32 27,35 32.5,35 35,32.5 35,-2.5 32.5,-5 27,-5 24,-2 11,-2 8,-5 3,-5 0,-2
AGND on Mid Layer 1 "AGND_L02_P000" (solid, pour order 0): 25.2,18.2 18.4,18.2 18.4,17.4 15.5,17.4 15.5,28.1 25.2,28.1 25.2,25.3 23,25.3 23,23.9 25.2,23.9
1V2 on Mid Layer 2 "1V2_L03_P003" (solid, pour order 3): 22,14.999 22,12.5 5.5,12.5 5.5,20 6,20 17.25,20 17.25,17.05 17.2,17 18,16.2 18.8,16.2 18.804,16.204 19.996,16.204 21.2,15
1V8 on Mid Layer 2 "1V8_L03_P002" (solid, pour order 2): 1,17 1,6 24.6,6 24.6,16 21.6,19 17.2,19 17.2,17.8 17.2,17 18,16.2 20,16.2 21.2,15 22,15 22,12.5 5.5,12.5 5.5,17 4,17
2V8 on Bottom Layer "2V8_L04_P006" (solid, pour order 6): 9.2,10.5 8.5,11.2 8.5,16 11.5,16 11.5,13 13.5,13 13.5,10.5

## Silkscreen, mask and mechanical layers (free items; w line width, h text height)
Top Overlay:
  circle w0.254: c5,0 r4
  circle w0.254: c30,0 r4
  circle w0.254: c5,30 r4
  circle w0.254: c30,30 r4
  text "C2Sv0-S" at 30.149,24.25 h5 r270
  text "TO PROCESSOR" at 2.514,19.25 h1.2 r270
Board Shape:
  the board outline again, w0.2